# Altium PCB OLD-motordriver-v6.2.PcbDoc (part 2 of 2)
Units mil, origin at the board's own origin, x right, y up, seen from the top; angles counter-clockwise.
Board outline 3153.75 x 2790 mil, 4 copper layers (TOP, GND, POWER, BOT), stack 23.756 mil thick; 192 components, 82 nets, 493 pads, 611 vias.
Unrouted connection lines stored in the file: 13.
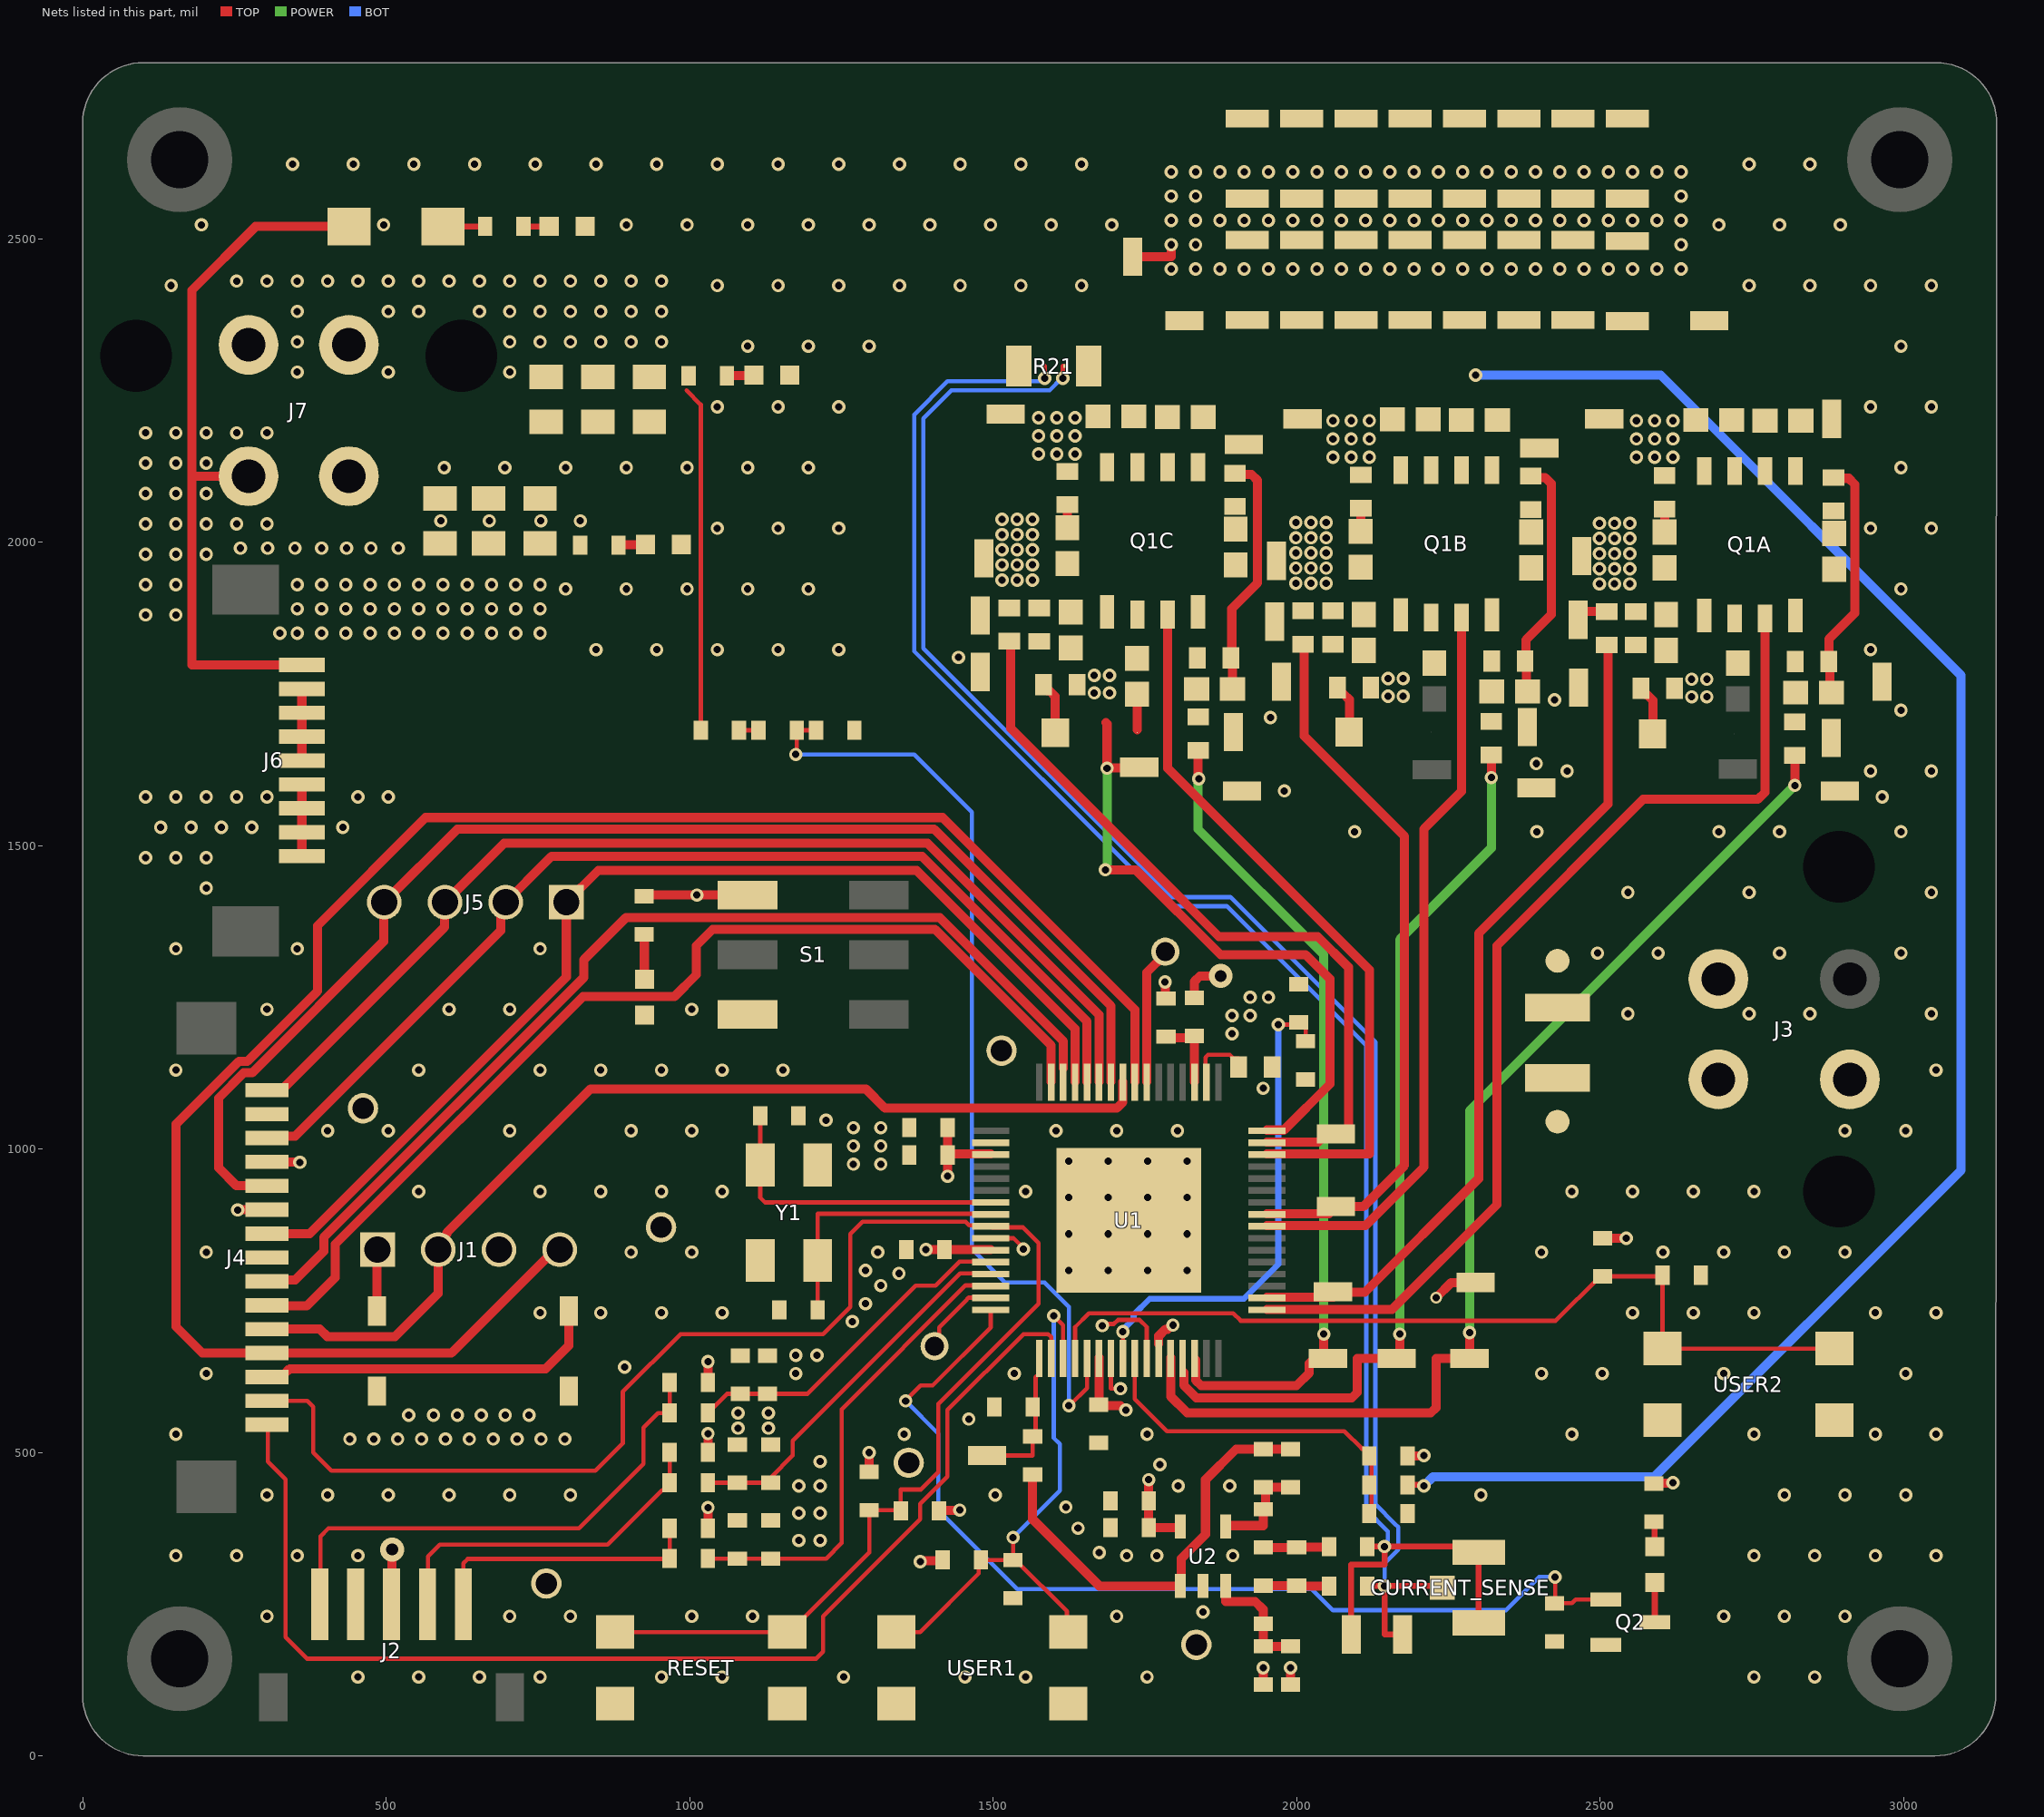
[diagram p4: the nets of this part, all layers, seen from the top]

## Via types
v1: diameter 22, hole 12, TOP to BOT, tented both sides, 606 vias
v2: diameter 22/22/22/22 (per signal layer), hole 12, TOP to BOT, tented both sides, 2 vias
v3: diameter 39.37, hole 19.68, TOP to BOT, tented both sides, 2 vias
v4: diameter 20, hole 12, TOP to BOT, tented both sides, 1 vias

## Nets (pads, with @x,y where several pads share a name; then routed paths per layer and width w, separated by ;. In a path a pad name is that pad's centre, name@x,y a point inside that pad or via, vN(x,y) a via of type N, cw(c..) or ccw(c..) an arc to the next point about the centre after c; other vN are vias at no path point) (continued)
BOOTC: BOOTC.1 C47C.2 D9C.1 U1.48 | length 1111.2
  TOP w15: v1(1685,1460) 1735,1460 1875,1320 2015,1320 2055,1280 2055,1106.89 1979.26,1031.14 U1.48@1951.22,1031.14 ; 1685.83,1702.39 1687.83,1700.39 v1(1687.83,1627.39) 1688.64,1628.19 1740.19,1628.19 BOOTC.1@1741,1629 ; C47C.2@1736.31,1749.86 1737.75,1748.42 1737.75,1690.39
  POWER w15: v1(1685,1460) 1685,1461.89 1687.97,1464.86 1687.97,1624.15 1687.83,1624.29 v1(1687.83,1627.39)
CIN: C19.2 R23.2 R24.2 U1.25 | length 599.5
  TOP w7: U1.25@1733.57,654.93 1733.57,587.95 1786.52,535 2078.8,535 2107.53,506.26 2111.47,506.26 2119.78,497.95 R23.2@2119.78,494.02 2123.5,490.29 2123.5,450.24 R24.2@2119.78,446.52 ; C19.2@2119.78,399.02 2123.5,402.74 2123.5,442.79 R24.2@2119.78,446.52 ; R24.2@2119.78,450.45 R24.2@2119.78,446.52
CRYSTAL_F0: C13.2 U1.7 Y1.1 | length 520.8
  TOP w7: C13.2@1116.48,1055 Y1.1@1116.48,973.74 1116.48,920 1124.52,911.96 U1.7@1496.22,911.96 U1.7@1494.27,910
CRYSTAL_F1: C14.2 U1.8 Y1.3 | length 443.6
  TOP w7: C14.2@1210.97,735 Y1.3@1210.97,816.26 1210.97,893.35 U1.8@1496.22,893.35
CURR_FB: C16.2 C_FB.1 R17.2 U1.17 | length 244.3
  TOP w7: C_FB.1@1490,495 1565.22,495 R17.2@1565.22,526.5 1570,531.28 1570,569.89 C16.2@1565.22,574.67 ; C16.2@1565.48,574.94 1570,579.45 1570,623.84 1576.09,629.93 U1.17@1576.09,656
ENC_A: J2.5 R1.2 R4.1 | length 460.5
  TOP w7: J2.5@627.17,250 627.17,317.17 634.42,324.42 966.65,324.42 R4.1@967.23,325 R1.2@967.23,375
ENC_A_MCU: C7.2 R4.2 R7.1 U1.14 | length 781.5
  TOP w7: R4.2@1030.22,325 R7.1@1078.72,325 1082.66,325 C7.2@1133.72,325 1225,325 1250.81,350.81 1250.81,571.05 1455,775.24 U1.14@1496.22,775.24
ENC_B: J2.4 R2.2 R5.1 | length 607.4
  TOP w7: J2.4@569,222.04 569,328.59 588.41,348 865.23,348 954.98,437.75 958.92,437.75 967.23,446.06 R5.1@967.23,450 R2.2@967.23,500
ENC_B_MCU: C8.2 R5.2 R8.1 U1.13 | length 628.2
  TOP w7: R5.2@1030.22,450 R8.1@1078.72,450 C8.2@1133.72,450 1133.72,458.72 1170,495 1170,519.2 1445.72,794.92 1446.34,794.92 U1.13@1496.22,794.92
ENC_N: J2.1 R3.2 R6.1 | length 884.3
  TOP w7: J2.1@391.83,222.04 391.83,361.83 405,375 817.65,375 924,481.35 924,541 948,565 R6.1@967.23,565 R3.2@967.23,615
ENC_N_MCU: C9.2 R6.2 R9.1 U1.12 | length 569.4
  TOP w7: R6.2@1030.22,565 1061.72,596.5 R9.1@1083.72,596.5 C9.2@1128.72,596.5 1194.08,596.5 1372.58,775 1405,775 1444.61,814.61 U1.12@1496.22,814.61
GND: C1.1 C2.1 C3.1 C4.1 C5.1 C7.1 C8.1 C9.1 C11.1 C12.1 C13.1 C14.1 C16.1 C17.1 C19.1 C20.1 C21.1 C22.1 D1.2 GND1.1 J1.03 J2.2 J4.02 J4.04 J4.06 J4.08 pad.2 Q2.2 R7.2 R8.2 R9.2 R10.2 R37.2 R38.1 RESET.1 RESET.2 S1.3 U1.2 U1.10 U1.23 U1.26 U1.EPAD U2.2 USER1.1 USER1.2 USER2.1 USER2.2 Y1.2 Y1.4 | length 430
  TOP w7: U1.10@1496.22,852.9 1533.97,852.9 1550,836.87 v1(1550,835) ; v1(1680,708.88) 1682.87,711.75 1699.26,711.75 1705.8,718.29 1741.71,718.29 1753.25,706.75 U1.26@1753.25,654.93 ; U1.23@1694.2,656 1694.2,605 v1(1710,605)
  TOP w15: v1(255.44,899.48) 255.68,899.72 303.76,899.72 J4.06@304,899.96 ; J4.04@304,978.7 304.35,978.35 357.65,978.35 v1(358,978) ; J2.2@450.36,254.08 J2.2@450.89,254.61 ; C17.1@1410.99,404 1411.49,404.5 1444.5,404.5 v1(1445,405) ; v1(1783.42,1275.3) 1783.57,1275.15 1783.57,1246.65 C5.1@1783.72,1246.5
  other v1: 453.72,130 553.72,130 653.72,130 753.72,130 953.72,130 1053.72,130 1253.72,130 1453.72,130 1553.72,130 1753.72,130 2753.72,130 2853.72,130 303.72,230 703.72,230 803.72,230 1003.72,230 1103.72,230 1703.72,230 2703.72,230 2803.72,230 2903.72,230 1846,237 153.72,330 253.72,330 353.72,330 453.72,330 1720,330 1770,330 1895,330 2753.72,330 2853.72,330 2953.72,330 3053.72,330 1675,335 1180,355 1215,355 1640,375 1180,400 1215,400 1620,410 303.72,430 403.72,430 503.72,430 603.72,430 703.72,430 803.72,430 1503.72,430 2303.72,430 2803.72,430 2903.72,430 3003.72,430 1180,445 1215,445 1805,445 1890,445 1775,480 1215,485 153.72,530 1353.72,530 1753.72,530 2453.72,530 2753.72,530 2953.72,530 3053.72,530 1080,540 1130,540 1460,555 1080,565 1130,565 203.72,630 1175,630 1535,630 2403.72,630 2503.72,630 2703.72,630 3003.72,630 893.07,640.65 1175,660 1210,660 1268.15,715.57 753.72,730 853.72,730 953.72,730 1053.72,730 2553.72,730 2653.72,730 2753.72,730 2953.72,730 3053.72,730 1290,745 1315,775 1345,795 1290,800 1625,800 1690,800 1755,800 1820,800 203.72,830 903.72,830 1003.72,830 1310,830 2403.72,830 2603.72,830 2703.72,830 2803.72,830 2903.72,830 1625,860 1690,860 1755,860 1820,860 1625,920 1690,920 1755,920 1820,920 553.72,930 753.72,930 853.72,930 953.72,930 1053.72,930 1553.72,930 2453.72,930 2553.72,930 2653.72,930 2753.72,930 1270,975 1315,975 1625,980 1690,980 1755,980 1820,980 1270,1005 1315,1005 403.72,1030 503.72,1030 703.72,1030 903.72,1030 1003.72,1030 1603.72,1030 1703.72,1030 1803.72,1030 2903.72,1030 3003.72,1030 1270,1035 1315,1035 1225,1047.5 153.72,1130 553.72,1130 753.72,1130 853.72,1130 953.72,1130 1053.72,1130 1153.72,1130 3053.72,1130 303.72,1230 603.72,1230 703.72,1230 1003.72,1230 153.72,1330 353.72,1330 753.72,1330 203.72,1430
  other v2: 1945,1100
GPIO_PA4: Q2.1 R38.2 U1.16 | length 1660.1
  TOP w7: v1@1355,585 1380.5,610.5 1400.5,610.5 1496.22,706.22 U1.16@1496.22,734.79 ; v1(2426,294.78) 2426,252.5 R38.2@2425,251.5 2453.99,251.5 2460,257.51 2509.54,257.51 Q2.1@2509.65,257.4
  BOT w7: v1(1356,584.78) 1410,530.78 1410,405 1540,275 2025,275 2060,240 2345,240 2399.78,294.78 v1(2426,294.78)
GPIO_PA7: C21.2 R27.2 U1.19 USER1.3 USER1.4 | length 928.8
  TOP w7: USER1.3@1340.54,204 1379.71,204 1476.31,300.6 1476.31,319.06 R27.2@1480,322.75 C21.2@1533,322.75 ; v1(1533,360) C21.2@1533,322.75 ; v1(1600,725) 1615.46,709.54 U1.19@1615.46,654.93 U1.19@1613.46,652.93 ; USER1.4@1624,204 1621.73,206.27 1621.73,237.96 1536.94,322.75 C21.2@1533,322.75
  BOT w7: v1(1533,360) 1610,437 1610,513.97 1600,523.97 v1(1600,725)
GPIO_PB0: C22.2 R29.2 U1.20 USER2.3 USER2.4 | length 1468.4
  TOP w7: U1.20@1635.14,656 1635.14,706.42 1658.02,729.29 1895.71,729.29 1908,717 2427.15,717 2500.15,790 R29.2@2504.08,790 2601.09,790 C22.2@2603.09,792 2603.09,671.2 USER2.3@2603,671.11 USER2.4@2886.46,671.11
HGA: C48A.2 HGA.1 Q1A.1 R30A.2 R33A.2 | length 55.7
  TOP w15: HGA.1@2464,1872 2464,1877.31 2472.25,1885.56 R30A.2@2511,1885.56
HGB: C48B.2 HGB.1 Q1B.1 R30B.2 R33B.2
HGC: C48C.2 HGC.1 Q1C.1 R30C.2 R33C.2
HV: C23.2 C24.2 C25.2 C29.2 C30.2 C31.2 C32.2 C33.2 C34.2 C35.2 C36.2 C37.2 C38.2 C39.2 C40.2 C41.2 C42.2 C43.2 C44.2 C46A.2 C46B.2 C46C.2 J6.2 J6.3 J6.4 J6.5 J7.3 J7.4 Q1A.7 Q1A.8 Q1B.7 Q1B.8 Q1C.7 Q1C.8 R16.2 R28A.2 R28B.2 R28C.2 R39.1 TP10A.1 TP10B.1 TP10C.1 TP11.1 | length 771.6
  TOP w7: 995,2250 1018.5,2226.5 R39.1@1018.5,1690
  TOP w15: J6.5@361.26,1640 J6.2@361.26,1758.11 ; TP11.1@1730,2470 1793.72,2470 v1(1793.72,2490)
  other v1: 325,1850 353.72,1850 393.72,1850 433.72,1850 473.72,1850 513.72,1850 553.72,1850 593.72,1850 633.72,1850 673.72,1850 713.72,1850 753.72,1850 353.72,1890 393.72,1890 433.72,1890 473.72,1890 513.72,1890 553.72,1890 593.72,1890 633.72,1890 673.72,1890 713.72,1890 753.72,1890 353.72,1930 393.72,1930 433.72,1930 473.72,1930 513.72,1930 553.72,1930 593.72,1930 633.72,1930 673.72,1930 713.72,1930 753.72,1930 2060,2140 2090,2140 2120,2140 2560,2140 2590,2140 2620,2140 1575,2145 1605,2145 1635,2145 2060,2170 2090,2170 2120,2170 2560,2170 2590,2170 2620,2170 1575,2175 1605,2175 1635,2175 2060,2200 2090,2200 2120,2200 2560,2200 2590,2200 2620,2200 1575,2205 1605,2205 1635,2205 353.72,2280 503.72,2280 703.72,2280 353.72,2330 703.72,2330 753.72,2330 803.72,2330 853.72,2330 903.72,2330 953.72,2330 353.72,2380 503.72,2380 553.72,2380 653.72,2380 703.72,2380 753.72,2380 803.72,2380 853.72,2380 903.72,2380 953.72,2380 253.72,2430 303.72,2430 353.72,2430 403.72,2430 453.72,2430 503.72,2430 553.72,2430 603.72,2430 653.72,2430 703.72,2430 753.72,2430 803.72,2430 853.72,2430 903.72,2430 953.72,2430 1793.72,2450 1833.72,2450 1873.72,2450 1913.72,2450 1953.72,2450 1993.72,2450 2033.72,2450 2073.72,2450 2113.72,2450 2153.72,2450 2193.72,2450 2233.72,2450 2273.72,2450 2313.72,2450 2353.72,2450 2393.72,2450 2433.72,2450 2473.72,2450 2513.72,2450 2553.72,2450 2593.72,2450 2633.72,2450 1833.72,2490 2633.72,2490 1793.72,2530 1833.72,2530 1873.72,2530 1913.72,2530 1953.72,2530 1993.72,2530 2033.72,2530 2073.72,2530 2113.72,2530 2153.72,2530 2193.72,2530 2233.72,2530 2273.72,2530 2313.72,2530 2353.72,2530 2393.72,2530 2433.72,2530 2473.72,2530 2513.72,2530 2553.72,2530 2593.72,2530 2633.72,2530 1793.72,2570 1833.72,2570 2633.72,2570 1793.72,2610 1833.72,2610 1873.72,2610 1913.72,2610 1953.72,2610 1993.72,2610 2033.72,2610 2073.72,2610 2113.72,2610 2153.72,2610 2193.72,2610 2233.72,2610 2273.72,2610 2313.72,2610 2353.72,2610 2393.72,2610 2433.72,2610 2473.72,2610 2513.72,2610 2553.72,2610 2593.72,2610 2633.72,2610
HVGA: HVGA.1 R30A.1 U1.34 | length 1404.7
  TOP w15: U1.34@1951.22,755.55 2060,755.55 HVGA.1@2060,765 2061.16,763.84 2112.84,763.84 2300,951 2300,1355 2513,1568 2513,1828.44 R30A.1@2511,1830.44
HVGB: HVGB.1 R30B.1 U1.41 | length 1187.6
  TOP w15: U1.41@1951.22,893.35 2053.35,893.35 HVGB.1@2065,905 2110,905 2178,973 2178,1515 2012.82,1680.18 2012.82,1829.56 R30B.1@2010.82,1831.56
HVGC: HVGC.1 R30C.1 U1.47 | length 1273.7
  TOP w15: R30C.1@1526.83,1836.83 1528.83,1834.83 1528.83,1693.17 1759.81,1462.19 1872,1350 2035,1350 2085.47,1299.53 2085.47,1033.25 2077.22,1025 2049.25,1025 2035.71,1011.46 U1.47@1951.22,1011.46
LGA: C51A.2 LGA.1 Q1A.4 R34A.2 R36A.2
LGB: C51B.2 LGB.1 Q1B.4 R34B.2 R36B.2
LGC: C51C.2 LGC.1 Q1C.4 R34C.2 R36C.2
LVGA: LVGA.1 R34A.1 U1.28 | length 1868
  TOP w15: U1.28@1792.62,656 1792.62,592.38 1820,565 2221.21,565 2230,573.79 2230,655 LVGA.1@2285,655 v1(2285,697.5) ; v1(2821,1599) v1(2821,1599) R34A.1@2821.04,1648.78
  POWER w15: v1(2285,697.5) 2285,1063 v1(2821,1599)
LVGB: LVGB.1 R34B.1 U1.29 | length 1507.4
  TOP w15: U1.29@1814.31,631.93 1814.31,610.69 1835,590 2091.21,590 2100,598.79 2100,655 LVGB.1@2165,655 2170,655 v1(2170,695) ; v1(2321,1612) 2321,1654.36 R34B.1@2321.08,1654.44
  POWER w15: v1(2170,695) 2170,1345 2321,1496 v1(2321,1612)
LVGC: LVGC.1 R34C.1 U1.30 | length 1363.5
  TOP w15: U1.30@1833.99,652.93 1833.99,618.79 1842.78,610 2000,610 2021,631 2021,646.75 2029.25,655 2045,655 v1(2045,695) ; v1@1838,1611 R34C.1@1838,1656.58
  POWER w15: v1(1839,1610) 1837.83,1608.83 1837.83,1527.17 2045,1320 v1(2045,695)
NetC15_1: C15.1 R18.1 R19.2 | length 105.4
  TOP w15: R18.1@1945,343.5 C15.1@2000.25,343.5 ; C15.1@2003.97,343.5 2004.72,344.25 2052.76,344.25 R19.2@2053.5,345
NetC15_2: C15.2 R14.1 R15.2 | length 108.7
  TOP w15: R14.1@1945,280.51 C15.2@2000.25,280.51 2000.76,280 R15.2@2053.5,280
NetC18_1: C18.1 R17.1 R22.2 U2.1 | length 715.7
  TOP w15: R17.1@1565.22,463.5 1565.22,389.78 1675,280 U2.1@1808.72,280 1810,281.28 1810,325 1850,365 1850,455 1900.51,505.51 C18.1@1945,505.51 R22.2@1990,505.51
NetC20_2: C20.2 R25.1 U1.24 | length 815.5
  TOP w7: U1.24@1713.88,656 v1(1713.88,698.79) ; v2(1970,1205) 1996.28,1205 1999.79,1208.5 R25.1@2003.72,1208.5 ; R25.1@2006.69,1208.5 2015,1200.19 C20.2@2015,1177.49
  BOT w10: v1(1713.88,698.79) 1713.88,701.81 1731.61,719.54 1731.61,726.61 1758.08,753.08 1913.08,753.08 1970,810 v2(1970,1205)
NetC45A_2: C45A.2 R28A.1 | length 37.9
  TOP w15: C45A.2@2606.47,2016.53 R28A.1@2606.47,2054.44
NetC45B_2: C45B.2 R28B.1 | length 37.9
  TOP w15: C45B.2@2106.3,2017.65 R28B.1@2106.3,2055.56
NetC45C_2: C45C.2 R28C.1 | length 37.9
  TOP w15: C45C.2@1622.31,2022.91 R28C.1@1622.31,2060.83
NetC46A_1: C46A.1 C49A.2
NetC46B_1: C46B.1 C49B.2
NetC46C_1: C46C.1 C49C.2
NetC50A_1: C50A.1 R35A.2
NetC50B_1: C50B.1 R35B.2
NetC50C_1: C50C.1 R35C.2
NetD1_1: D1.1 R11.1 | length 74.4
  TOP w15: R11.1@925,1353.5 925.52,1352.99 925.52,1280.04 D1.1@926.03,1279.53
NetD2_1: D2.1 R13.1 | length 44.9
  TOP w15: R13.1@882.99,1995 883.51,1995.52 926.92,1995.52 D2.1@927.44,1996.03
NetD3_1: D3.1 R16.1 | length 44.9
  TOP w15: R16.1@1061.5,2273.97 1062.01,2274.48 1105.43,2274.48 D3.1@1105.94,2275
NetD6_1: D6.1 R32.1 | length 41.7
  TOP w10: R32.1@2588.72,385.68 2590,384.4 D6.1@2590,344.53
NetD6_2: D6.2 Q2.3 | length 65.6
  TOP w10: D6.2@2590,285.47 2590.35,285.12 Q2.3@2590.35,220
NetD7_2: D7.2 R31.1 | length 69.4
  TOP w10: D7.2@593.96,2520 R31.1@663.35,2520
NetD8_1: D8.1 R31.2 | length 42.3
  TOP w10: R31.2@726.34,2520 D8.1@768.64,2520
NetD9A_2: D9A.2 R26A.1 | length 85
  TOP w15: R26A.1@2567.44,1759 2567.44,1755.06 2573.72,1748.78 2577.66,1748.78 2587,1739.44 D9A.2@2587,1684.44
NetD9B_2: D9B.2 R26B.1 | length 83.2
  TOP w15: R26B.1@2067.27,1760.12 2067.27,1756.18 2073.54,1749.9 2077.48,1749.9 2087,1740.38 D9B.2@2087,1687.44
NetD9C_2: D9C.2 R26C.1 | length 89.2
  TOP w15: R26C.1@1583.23,1765.06 1583.23,1761.13 1589.51,1754.85 1593.21,1754.85 1602,1746.06 1602,1686.56 D9C.2@1602.56,1686
NetJ4_15: J4.15 U1.18 | length 2012
  TOP w7: J4.15@304,545.63 305,544.63 305,485 334.22,455.78 334.22,195.78 370,160 1208.32,160 1220,171.68 1220,230 1380,390 1380,415 1425,460 1425,570 1550,695 1590.79,695 1595.77,690.02 U1.18@1595.77,654.93 U1.18@1594.89,655.81
NetPA3_1: PA3.1 U1.15 | length 139.8
  TOP w7: PA3.1@1403.72,675 1411.28,682.56 1411.28,706.28 1453.6,748.6 1460.04,755.04 1470.71,755.04 1471.22,755.55 U1.15@1496.22,755.55
NetPA12_1: PA12.1 U1.55 | length 226.6
  TOP w15: U1.55@1753.25,1111 1753.25,1290.77 1783.72,1321.25 PA12.1@1783.72,1325
NetR37_1: R37.1 U1.50 | length 130.1
  TOP w7: U1.50@1851.68,1109.93 1850,1111.61 1850,1150.9 1854.1,1155 1890,1155 1895.19,1149.81 1895.19,1144.69 R37.1@1904.88,1135 ; R37.1@1894.6,1149.22 1904.88,1149.22 R37.1@1904.88,1138.94
NetR39_2: R39.2 R40.1 | length 32
  TOP w7: R39.2@1081.5,1690 R40.1@1113.5,1690
NRST: C17.2 J4.14 R20.2 RESET.3 RESET.4 U1.9 | length 2816.5
  TOP w7: J4.14@304,585 370,585 380,575 380,500 410,470 845,470 890,515 890,600 985,695 1220,695 1265,740 1265,860 1285,880 1455,880 1460.89,874.11 1494.71,874.11 1497.91,870.9 1549.1,870.9 1575,845 1575,745 1410,580 1410,467.86 1381.14,439 1348,439 C17.2@1348,404 1347,405 R20.2@1296,405 1296,335.06 1164.94,204 RESET.4@1161,204 RESET.3@877.54,204
OUTA: C45A.1 C47A.1 C48A.1 C50A.2 J3.3 OUT1A.1 Q1A.2 Q1A.3 R33A.1 U1.33 | length 1709.8
  TOP w15: U1.33@1951.22,735.87 2157.59,735.87 2330,908.27 2330,1335 2571,1576 2760,1576 2771.73,1587.73 Q1A.3@2771.73,1874.22
  other v1: 2499,1931 2524,1931 2549,1931 2499,1956 2524,1956 2549,1956 2499,1981 2524,1981 2549,1981 2499,2006 2524,2006 2549,2006 2499,2031 2524,2031 2549,2031
OUTB: C45B.1 C47B.1 C48B.1 C50B.2 J3.2 OUT1B.1 Q1B.2 Q1B.3 R33B.1 U1.40 | length 1229.8
  TOP w15: U1.40@1951.22,873.66 2113.66,873.66 2210,970 2210,1527.29 2272,1589.29 Q1B.3@2272,1875.49
  other v1: 1998.82,1932.12 2023.82,1932.12 2048.82,1932.12 1998.82,1957.12 2023.82,1957.12 2048.82,1957.12 1998.82,1982.12 2023.82,1982.12 2048.82,1982.12 1998.82,2007.12 2023.82,2007.12 2048.82,2007.12 1998.82,2032.12 2023.82,2032.12 2048.82,2032.12
OUTC: C45C.1 C47C.1 C48C.1 C50C.2 J3.1 OUT1C.1 Q1C.2 Q1C.3 R33C.1 U1.46 | length 1195.3
  TOP w15: Q1C.3@1787.57,1880.61 1787.57,1627.43 2120,1295 2120,991.77 U1.46@1951.22,991.77
  other v1: 1514.83,1937.39 1539.83,1937.39 1564.83,1937.39 1514.83,1962.39 1539.83,1962.39 1564.83,1962.39 1514.83,1987.39 1539.83,1987.39 1564.83,1987.39 1514.83,2012.39 1539.83,2012.39 1564.83,2012.39 1514.83,2037.39 1539.83,2037.39 1564.83,2037.39
PGND: C6.1 C10.2 C23.1 C24.1 C25.1 C26.1 C27.1 C28.1 C29.1 C30.1 C31.1 C32.1 C33.1 C34.1 C35.1 C36.1 C37.1 C38.1 C39.1 C40.1 C41.1 C42.1 C43.1 C44.1 D2.2 D3.2 D8.2 J6.6 J6.7 J6.8 J6.9 J7.1 PGND1.1 R10.1 R12.1 R21.2 R41.1 TP1.1 TP2.1 TP3.1 TP4.1 TP5.1 TP6.1 TP7.1 TP8.1 TP9.1 TP12.1 U1.27 | length 365.8
  TOP w15: J6.9@361.26,1482.52 J6.8@361.26,1521.89 J6.6@361.26,1600.63 ; U1.27@1772.94,679 1772.94,691.91 1783.95,702.93 1787.55,702.93 1794.41,709.79 v1(1796.31,709.79) ; C6.1@1831.99,1249.18 1831.99,1276.21 1840.78,1285 v3(1875,1285) ; R12.1@1945,117.52 v1(1945,145) ; C10.2@1990,117.52 v1(1990,145) ; v4(2230,755) 2255,780 TP9.1@2295,780
  other v1: 2545.83,1222.74 2745.83,1222.74 2845.83,1222.74 3045.83,1222.74 2495.83,1322.74 2595.83,1322.74 2795.83,1322.74 2995.83,1322.74 2545.83,1422.74 2745.83,1422.74 3045.83,1422.74 103.72,1480 153.72,1480 203.72,1480 2095.83,1522.74 2395.83,1522.74 2695.83,1522.74 2795.83,1522.74 2995.83,1522.74 128.72,1530 178.72,1530 228.72,1530 278.72,1530 428.72,1530 103.72,1580 153.72,1580 203.72,1580 253.72,1580 303.72,1580 453.72,1580 503.72,1580 2965,1580 1980,1590 2445.83,1622.74 2945.83,1622.74 3045.83,1622.74 2395,1635 1957,1711 2995.83,1722.74 2425,1740 1443,1810 845.83,1822.74 945.83,1822.74 1045.83,1822.74 1145.83,1822.74 1245.83,1822.74 2945.83,1822.74 795.83,1922.74 895.83,1922.74 995.83,1922.74 1095.83,1922.74 1195.83,1922.74 2995.83,1922.74 1045.83,2022.74 1145.83,2022.74 1245.83,2022.74 2945.83,2022.74 3045.83,2022.74 595.83,2122.74 695.83,2122.74 795.83,2122.74 895.83,2122.74 995.83,2122.74 1095.83,2122.74 1195.83,2122.74 2995.83,2122.74 1045.83,2222.74 1145.83,2222.74 1245.83,2222.74 2945.83,2222.74 3045.83,2222.74 1095.83,2322.74 1195.83,2322.74 1295.83,2322.74 2995.83,2322.74 145.83,2422.74 1045.83,2422.74 1145.83,2422.74 1245.83,2422.74 1345.83,2422.74 1445.83,2422.74 1545.83,2422.74 1645.83,2422.74 2745.83,2422.74 2845.83,2422.74 2945.83,2422.74 3045.83,2422.74 195.83,2522.74 495.83,2522.74 895.83,2522.74 995.83,2522.74 1095.83,2522.74 1195.83,2522.74 1295.83,2522.74 1395.83,2522.74 1495.83,2522.74 1595.83,2522.74 1695.83,2522.74 2695.83,2522.74 2795.83,2522.74 2895.83,2522.74 345.83,2622.74 445.83,2622.74 545.83,2622.74 645.83,2622.74 745.83,2622.74 845.83,2622.74 945.83,2622.74 1045.83,2622.74 1145.83,2622.74 1245.83,2622.74 1345.83,2622.74 1445.83,2622.74 1545.83,2622.74 1645.83,2622.74 2745.83,2622.74 2845.83,2622.74
SENSE: C49A.1 C49B.1 C49C.1 C51A.1 C51B.1 C51C.1 Q1A.5 Q1A.6 Q1B.5 Q1B.6 Q1C.5 Q1C.6 R21.1 R24.1 R35A.1 R35B.1 R35C.1 R36A.1 R36B.1 R36C.1 SENSE1A.1 SENSE1B.1 SENSE1C.1 | length 4165.3
  TOP w7: v1@2208.48,446.52 v1(2210,445)
  TOP w10: R24.1@2182.77,446.52 v1@2208.48,446.52
  TOP w15: C51C.1@1894.53,1758 1894.53,1807 1891.56,1807 1893.35,1808.79 1893.35,1890.35 1935.83,1932.83 1935.83,2101.39 1925.73,2111.49 1896.72,2111.49 R35C.1@1894.57,2113.64 ; R36B.1@2376.56,1801 2378,1801 2378,1839 2419.82,1880.82 2419.82,2096.12 2409.72,2106.22 2380.71,2106.22 R35B.1@2378.56,2108.37 ; R36B.1@2376.85,1805.07 2376.85,1801.13 2378.49,1799.49 2378.49,1760.23 C51B.1@2380.13,1758.59 ; R36A.1@2876.56,1803 2879.04,1800.52 2879.04,1761.34 C51A.1@2879,1761.3 ; R36A.1@2877,1804 2877,1840 2920,1883 2920,2095 2909.9,2105.1 2880.88,2105.1 R35A.1@2878.73,2107.25
  BOT w15: v1(2210,445) 2225,460 2590,460 3095,965 3095,1780 2600,2275 v1(2295,2275)
SENSE_F_N: C18.2 R18.2 R22.1 U2.4 | length 172.5
  TOP w15: U2.4@1883.53,378 1883.53,379.43 1945,379.43 R18.2@1945,406.5 ; R18.2@1948.72,406.5 1948.72,438.8 C18.2@1945,442.52 R22.1@1990,442.52
SENSE_F_P: C10.1 R12.2 R14.2 U2.3 | length 198.3
  TOP w15: U2.3@1883.53,280 1883.53,254.42 1931.95,254.42 1945,241.37 R14.2@1945,217.52 R12.2@1945,180.51 C10.1@1990,180.51
SENSE_N: CURRENT_SENSE.2 CURRENT_SENSE.3 R19.1 R21.S2 S_N.1 | length 3016.4
  TOP w7: R21.S2@1581.25,2290 1585,2290 v1(1585,2270)
  TOP w10: S_N.1@2090,200 2090,315 2145,315 v1(2145,345) ; R19.1@2116.5,345 v1(2145,345) ; CURRENT_SENSE.2@2300,219.12 CURRENT_SENSE.3@2300,335.27 2290.27,345 v1(2145,345)
  BOT w7: v1(1585,2270) 1585,2265 1425,2265 1370,2210 1370,1820 1790,1400 1885,1400 2115,1170 2115,405.41 2150.41,370 2150.41,354.46 2145,349.06 v1(2145,345)
SENSE_P: CURRENT_SENSE.1 R15.1 R21.S1 S_P.1 | length 2829.3
  TOP w7: v1(1615,2270) 1615,2290 R21.S1@1618.75,2290
  TOP w10: R15.1@2116.5,280 v1(2145,280) ; S_P.1@2175,200 2145,200 v1(2145,280) ; CURRENT_SENSE.1@2239.96,277.19 2237.16,280 v1(2145,280)
  BOT w7: v1(1615,2270) 1613.28,2270 1593.28,2250 1431.21,2250 1385,2203.79 1385,1825 1795,1415 1891.21,1415 2130,1176.21 2130,414.45 2162.43,382.02 2167.41,377.04 2167.41,339.83 2145,317.42 v1(2145,280)
SPI_CLK: J4.07 J5.01 U1.61 | length 1869.2
  TOP w15: J4.07@281.07,860.45 281.21,860.59 J4.07@304,860.59 374.31,860.59 797,1283.28 J5.01@797,1406.5 849.5,1459 1374,1459 1635.14,1197.86 U1.61@1635.14,1111
SPI_CS: J4.05 J5.04 U1.58 | length 2143.6
  TOP w15: J4.05@304,939.33 253.67,939.33 224,969 224,1084 265.37,1125.37 279.37,1125.37 495.94,1341.94 495.94,1405.44 617.55,1527.05 1402.95,1527.05 1694.2,1235.8 U1.58@1694.2,1111
SPI_MISO: J4.01 J5.03 U1.59 | length 1790.3
  TOP w15: J4.01@304,1096.81 327.62,1096.81 596.06,1365.25 596.06,1405.56 694.5,1504 1392,1504 1674.51,1221.49 U1.59@1674.51,1111
SPI_MOSI: J4.03 J5.02 U1.60 | length 1777.3
  TOP w15: J4.03@304,1018.07 307,1021.07 350.07,1021.07 688.95,1359.95 688.95,1398.45 772.5,1482 1383,1482 1654.83,1210.17 U1.60@1654.83,1111
SWD_CLK: J1.02 J4.11 U1.57 | length 1685.1
  TOP w15: J4.11@304,703.11 390.89,703.11 403,691 515.04,691 586,761.96 586,845.39 600.09,859.48 600.09,862.09 837,1099 1290.29,1099 1321.77,1067.53 1704.17,1067.53 1713.88,1077.24 U1.57@1713.88,1111
SWD_IO: J1.04 J4.12 U1.56 | length 3169.1
  TOP w15: J1.04@792.91,848.91 607.74,663.74 J4.12@304,663.74 197.26,663.74 154,707 154,1040.87 205,1091.87 257.5,1144.37 271.5,1144.37 387,1259.87 387,1368 565.05,1546.05 1416.95,1546.05 1733.57,1229.43 U1.56@1733.57,1111
UART_RX: J4.10 U1.63 | length 1725.7
  TOP w15: J4.10@326.4,741.26 369.26,741.26 416.22,788.22 416.22,843.05 824.17,1251 975,1251 1011,1287 1011,1335 1038,1362 1404.48,1362 1595.77,1170.71 U1.63@1595.77,1111
UART_TX: J4.09 U1.62 | length 1719.2
  TOP w15: J4.09@304,781.85 306.61,784.46 350.46,784.46 397.22,831.22 397.22,854.22 826,1283 826,1312 895,1381 1412.35,1381 1614.77,1178.58 1614.77,1177.87 1615.46,1177.19 U1.62@1615.46,1132.93
VBUS_FDBK: R40.2 R41.2 U1.21 | length 1571
  TOP w7: v1@1176.5,1650 R40.2@1176.5,1690 R41.2@1208.5,1690 ; v1@1627.66,578.67 1654.83,605.84 U1.21@1654.83,654.93
  BOT w7: v1(1175,1650) 1370,1650 1465,1555 1465,835 1520,780 1585,780 1625,740 v1(1625,577.18)
VCC: C5.2 C6.2 C26.2 C27.2 C28.2 D7.1 J6.1 J7.2 R13.2 R25.2 R26A.2 R26B.2 R26C.2 U1.51 | length 1315.1
  TOP w15: J7.2@273.37,2108.46 180,2108.46 ; J6.1@361.26,1797.48 335.67,1797.48 180,1797.48 180,2108.46 ; D7.1@438.72,2520 285,2520 180,2415 180,2108.46 ; C5.2@1783.72,1183.5 1831.99,1183.5 U1.51@1831.99,1111
  other v1: 1893.72,1190 1893.72,1220 1923.72,1220 1923.72,1250 1953.72,1250 2651,1745 2676,1745 2150.82,1746.12 2175.82,1746.12 1666.83,1751.39 1691.83,1751.39 2651,1774 2676,1774 2150.82,1775.12 2175.82,1775.12 1666.83,1780.39 1691.83,1780.39 103.72,1880 153.72,1880 103.72,1930 153.72,1930 103.72,1980 153.72,1980 203.72,1980 260,1990 305,1990 350,1990 393.72,1990 435,1990 475,1990 520,1990 103.72,2030 153.72,2030 203.72,2030 253.72,2030 303.72,2030 590,2035 670,2035 755,2035 820,2035 103.72,2080 153.72,2080 203.72,2080 103.72,2130 153.72,2130 203.72,2130 103.72,2180 153.72,2180 203.72,2180 253.72,2180 303.72,2180
VDD: C1.2 C2.2 C3.2 C4.2 C11.2 C12.2 D4.C D5.C J2.3 R1.1 R2.1 R3.1 R11.2 R20.1 R23.1 R27.1 R29.1 R32.2 S1.1 U1.3 U1.11 U1.22 U2.5 | length 1073.9
  TOP w15: J2.3@509.89,210.37 509.53,210.73 509.53,339.53 v3(510,340) ; R11.2@925,1416.5 926.93,1418.43 v1(1012.15,1418.43) S1.1@1095.46,1418.43 ; R1.1@1030.22,375 v1(1030.22,409.29) ; R2.1@1030.22,500 v1(1030.22,531.07) ; R3.1@1030.22,615 v1(1030.22,649.5) ; R20.1@1296,465.49 R20.1@1296,467.99 v1(1296,499.78) ; v1(1380,320) 1381.34,321.34 1415.6,321.34 R27.1@1417.01,322.75 ; v1(1389.43,834.29) U1.11@1496.22,834.29 ; v1(1425,955) 1425,981.75 1423.72,991.77 U1.3@1496.22,991.77 ; C2.2@1425,990 C1.2@1425,1035 ; U1.22@1674.51,656 1674.51,577.18 1710.19,577.18 ; v1(1756.5,455) 1756.5,421.28 C11.2@1756.5,376.28 1807.22,376.28 1808.72,377.78 U2.5@1808.72,378 ; R23.1@2182.77,494.02 2209.02,494.02 v1(2210,495) ; R29.1@2504.08,852.99 v1(2543.08,853) ; R32.2@2592.77,449.02 v1@2619.02,449.02
  other v1: 2620,450 440.34,522.13 479.71,522.13 519.08,522.13 558.45,522.13 597.82,522.13 637.19,522.13 676.56,522.13 715.93,522.13 755.3,522.13 794.67,522.13 537.3,561.5 578.13,561.5 617.5,561.5 656.87,561.5 696.24,561.5 735.62,561.5 1718.72,570
VDD_SWD: D4.A J1.01 | length 101.4
  TOP w15: D4.A@485,733 485,833 J1.01@486,834
VDD_UI: D5.A J4.13 | length 575.4
  TOP w15: J4.13@304,624.37 308.31,628.68 331.93,628.68 341.25,638 763,638 801,676 801,724 D5.A@801,733
pads on no net: J2.6 J2.7 J3.4 J3.MH1 J4.S1 J4.S2 J6.MP1 J6.MP2 J7.MH1 S1.4 S1.5 S1.6 U1.1 U1.4 U1.5 U1.6 U1.31 U1.32 U1.36 U1.37 U1.38 U1.39 U1.43 U1.44 U1.45 U1.49 U1.52 U1.53 U1.54

## Polygon pours and split planes (outlines as drawn)
PGND on TOP "NONET_L-01_P-001" (solid, remove dead copper, pour order 172): 48.77,2750.09 3098.77,2750.09 3098.77,1160.09 1798.77,1160.09 1404.86,1554 48.77,1554
GND on TOP "GND_L01_P169" (solid, remove dead copper, pour order 169): 606.97,1625 426.97,1445 41.97,1445 41.97,20 3106.97,20 3106.97,1145 1831.97,1145 1351.97,1625
PGND on TOP "NONET_L-01_P-001" (solid, pour order 167): 315,1465 50,1465 50,1615 545,1615 545,1465
HV on TOP "TOP-HV 1" (solid, pour order 141): 1975.09,2121.44 2085.09,2121.44 2085.09,2067.98 2155.09,2067.98 2155.09,1951.44 2240.09,1951.44 2240.09,2079.44 2238.09,2081.44 2237.83,2081.44 2237.83,2163.8 2182.45,2163.8 2182.21,2221.44 1975.09,2221.44
HV on TOP "TOP-HV 3" (solid, pour order 170): 301.1,1625 498,1625 630,1757 703,1830 780,1830 780,1960 230,1960 230,1830 415,1830 415,1775 301.1,1775
SENSE on TOP "SENSE_L01_P166" (solid, pour order 166): 1670,2325 1670,2255 1700,2255 1700,2080 2907.43,2080 2907.43,2325
OUTC on TOP "TOP-No Net" (solid, remove dead copper, pour order 165): 1808.83,1904.39 1825.83,1921.39 1918.83,1921.39 1918.83,1991.39 1600.83,1991.39 1600.83,2063.39 1495.83,2063.39 1495.83,1919.39 1559.83,1919.39 1559.83,1793.39 1808.83,1793.39
NetC46C_1 on TOP "NONET_L-01_P-001" (solid, remove dead copper, pour order 154): 1710.83,2186.39 1810.83,2186.39 1810.83,2233.94 1710.83,2233.94
NetC50C_1 on TOP "NONET_L-01_P-001" (solid, remove dead copper, pour order 153): 1874.83,2000.39 1916.83,2000.39 1916.83,2073.39 1874.83,2073.39
LGC on TOP "NONET_L-01_P-001" (solid, remove dead copper, pour order 152): 1865.83,1755 1865.83,1754 1914,1754 1914,1681 1810.83,1681 1810.83,1900.39 1865.83,1900.39
HGC on TOP "NONET_L-01_P-001" (solid, remove dead copper, pour order 151): 1500,1870 1500,1845 1460,1845 1460,1911.39 1660.83,1911.39 1665.83,1916.39 1700.83,1916.39 1700.83,1854.39 1615.83,1854.39 1593.83,1876.39 1506.39,1876.39
VCC on TOP "NONET_L-01_P-001" (solid, remove dead copper, pour order 150): 1620.83,1741.39 1661.83,1741.39 1666.83,1736.39 1713.83,1736.39 1713.83,1797.39 1620.83,1797.39
OUTB on TOP "TOP-OUTB" (solid, remove dead copper, pour order 149): 2292.82,1899.12 2309.82,1916.12 2402.82,1916.12 2402.82,1986.12 2084.82,1986.12 2084.82,2058.12 1979.82,2058.12 1979.82,1914.12 2043.82,1914.12 2043.82,1788.12 2292.82,1788.12
NetC46B_1 on TOP "NONET_L-01_P-001" (solid, remove dead copper, pour order 148): 2194.82,2181.12 2294.82,2181.12 2294.82,2228.68 2194.82,2228.68
NetC50B_1 on TOP "NONET_L-01_P-001" (solid, remove dead copper, pour order 147): 2358.82,1995.12 2400.82,1995.12 2400.82,2068.12 2358.82,2068.12
LGB on TOP "NONET_L-01_P-001" (solid, remove dead copper, pour order 146): 2294.82,1660 2411,1660 2411,1895.12 2294.82,1895.12
HGB on TOP "NONET_L-01_P-001" (solid, remove dead copper, pour order 145): 2184.82,1849.12 2099.82,1849.12 2077.82,1871.12 1950,1871.12 1950,1906.12 2144.82,1906.12 2149.82,1911.12 2184.82,1911.12
VCC on TOP "NONET_L-01_P-001" (solid, remove dead copper, pour order 144): 2104.82,1736.12 2145.82,1736.12 2150.82,1731.12 2197.82,1731.12 2197.82,1792.12 2104.82,1792.12
OUTA on TOP "TOP-OUTA" (solid, remove dead copper, pour order 143): 2793,1898 2810,1915 2903,1915 2903,1985 2585,1985 2585,2065 2480,2065 2480,1913 2544,1913 2544,1787 2793,1787
HV on TOP "TOP-HV 2" (solid, pour order 142): 2475,2120 2585,2120 2585,2066.54 2655,2066.54 2655,1950 2740,1950 2740,2078 2475,2080 2737.74,2080 2737.74,2162.36 2682.36,2162.36 2682.11,2220 2475,2220
HV on TOP "TOP-HV" (solid, pour order 139): 1491.06,2126.39 1601.06,2126.39 1601.06,2072.93 1671.06,2072.93 1671.06,1956.39 1756.06,1956.39 1756.06,2084.39 1754.06,2086.39 1753.8,2086.39 1753.8,2168.75 1698.42,2168.75 1698.17,2226.39 1491.06,2226.39
NetC46A_1 on TOP "NONET_L-01_P-001" (solid, remove dead copper, pour order 137): 2695,2180 2795,2180 2795,2227.56 2695,2227.56
NetC50A_1 on TOP "NONET_L-01_P-001" (solid, remove dead copper, pour order 136): 2859,1994 2901,1994 2901,2067 2859,2067
LGA on TOP "NONET_L-01_P-001" (solid, remove dead copper, pour order 135): 2795,1678 2909,1678 2909,1894 2795,1894
HGA on TOP "NONET_L-01_P-001" (solid, remove dead copper, pour order 134): 2685,1848 2600,1848 2578,1870 2490,1870 2490,1905 2645,1905 2650,1910 2685,1910
VCC on TOP "NONET_L-01_P-001" (solid, remove dead copper, pour order 133): 2605,1735 2646,1735 2651,1730 2698,1730 2698,1791 2605,1791
VCC on TOP "VCC_L01_P131" (solid, pour order 131): 365,2025 845,2025 845,1970 235,1970 220,1955 220,1830 40,1830 40,2225 345,2225 345,2045
HV on TOP "HV_L01_P130" (solid, pour order 130): 200,2475 200,2235 1020,2235 1020,2475
HV on TOP "HV_L01_P129" (solid, pour order 129): 1770,2640 1770,2430 2665,2430 2665,2640
VCC on TOP "NONET_L-01_P-001" (solid, pour order 128): 1808.72,1210 1818.72,1220 1848.72,1220 1918.72,1290 2023.72,1290 2023.72,1240 1988.72,1240 1918.72,1170 1808.72,1170
VDD on TOP "VDD_L01_P121" (solid, pour order 127): 407,617 407,490 843,490 843,617
VDD on POWER "VDD_L03_P160" (solid, pour order 160): 40,1685 40,40 3100,40 3100,1685
VCC on POWER "VCC_L03_P158" (solid, pour order 158): 845,1965 251,1965 251,1825 365,1825 3105,1825 3105,1170 1455,1170 930,1695 40,1695 40,2215 845,2215
HV on POWER "HV_L03_P157" (solid, pour order 157): 40,2225 790,2225 850,2165 850,1980 830,1960 251,1960 251,1835 3115,1835 3115,2710 40,2710
VDD on POWER "NONET_L-01_P-001" (solid, pour order 168): 405,490 840,490 840,615 410,615 405,615
GND on BOT "GND_L04_P164" (solid, remove dead copper, pour order 164): 1280,1740 1280,2210 1395,2325 1635,2325 1635,1885 2122.11,1397.89 2164.19,1296.29 2269.92,1168.24 2297.04,1150.35 3100,1160 3100,35 35,35 35,1740
PGND on BOT "NONET_L-01_P-001" (solid, pour order 171): 2245,1040 2245,1195 1685,1755 50,1755 50,2755 3110,2755 3110,1040
OUTA on BOT "BOT-OUTA" (solid, pour order 159): 2479,1676 2815,1340 2815,1035 3115,1035 3115,1541.93 2655,2001.93 2655,2071 2479,2071
OUTB on BOT "OUTB_L04_P156" (solid, pour order 156): 2150,2001.21 2150,2069.63 1965,2072.37 1965,1830 2590,1205 2795,1205 2795,1315 2179.14,1930.86
OUTC on BOT "OUTC_L04_P155" (solid, pour order 155): 1490,2060 1490,1880 1560,1880 2405,1035 2795,1035 2795,1190 2560,1190 1690,2060
GND on GND "GND_L02_P162" (solid, remove dead copper, pour order 162): 705.6,1740 425.35,1454.51 40,1454.51 35,35 3100,35 3100,1160 1950,1160 1370,1740
PGND on GND "GND-PGND" (solid, pour order 161): 675,1705 430,1460 50,1460 50,1705 50,2750 3100,2750 3100,1160 2350,1160 2350,528.07 2094.07,528.07 2087.7,525.43 2073.08,510.81 2073.08,372.08 2075.72,365.72 2077.8,363.64 2084.16,361 2350,361 2350,120 1925,120 1925,235 1870,235 1870,410 1869.78,485.22 1765,590 1765,735 1900,735 1910,745 1910,1045 1975,1045 2035,1105 2035,1130 2005,1160 1948.72,1160 1403.72,1705

## Keep-outs
Keep-Out Layer:
  lines w78.74: 3151.96,100 cw(c3051.96,100) 3051.96,0 100,0 cw(c100,100) 0,100 0,2690 -0.02,2690 cw(c99.98,2690) 99.98,2790 3053.72,2790 cw(c3053.72,2690) 3153.72,2690 3151.99,100 ; 3151.96,100 3151.99,100

## Other copper
TOP:
  pour cut-out: 1750.83,1956.39 1773.83,1956.39 1773.83,1991.39 1750.83,1991.39
  pour cut-out: 2234.82,1951.12 2257.82,1951.12 2257.82,1986.12 2234.82,1986.12
  pour cut-out: 2735,1950 2758,1950 2758,1985 2735,1985
  pour cut-out: 1500,2330 1500,2325 1525,2325 1525,2255 1500,2255 1500,2250 1645,2250 1645,2330

## Silkscreen, mask and mechanical layers (free items; w line width, h text height)
Top Overlay:
  drawing of 28 lines, arcs and shapes, not listed
  text "DC-LINK" at 1660,2682.48 h50
  text "WARNING - INCORRECT VOLTAGE SOURCE" at 660,2567.48 h50
  text "HV" at 1726,2516 h25
  text "POWER | HV & VCC" at 138,2413 h30
  text "PGND" at 2641,2396 h25
  text "PGND" at 1761,2391 h25
  text "HV" at 1220,2265.83 h30
  text "SENSE" at 2823,2260 h25
  text "C-snub" at 1711,2251 h25
  text "HV" at 1986,2231 h25
  text "HV" at 2476,2231 h25
  text "HV" at 1426,2206 h25
  text "SENSE" at 1924,2186 h25 r90
  text "SENSE" at 2409,2186 h25 r90
  text "RC-snub" at 1416,2086 h25
  text "OUTA" at 2479,2026 h25 r90
  text "OUTB" at 1979,2016 h25 r90
  text "VCC" at 1050.03,1985.5 h30
  text "OUTC" at 1439,1936 h25 r90
  text "HGC" at 1439,1851 h25 r90
  text "PGND" at 3019,1746 h25 r90
  text "PGND" at 2034,1711 h25 r90
  text "PGND" at 2524,1706 h25 r90
  text "PGND" at 1449,1698 h25 r90
  text "PGND" at 1966,1581 h25
  text "PGND" at 2451,1581 h25
  text "PGND" at 2956,1576 h25
  text "FLASH" at 1386,1421 h25
  text "PGND" at 2411,1356 h25
  text "CS MISO MOSI CLK" at 413,1298 h30
  text "SRAM" at 1401,1246 h25
  text "GND" at 1405,1156 h25
  text "VDD" at 890,1140.78 h30
  text "GND" at 470,1101 h25
  text "GND" at 2416,981 h25
  text "MOTOR" at 2618,953 h30
  text "3V3 CLK GND IO" at 437,906 h30
  text "GND" at 989,859 h25
  text "PGND" at 2256,816 h25
  text "FLASH" at 567,659 h30
  text "GND" at 1427,464 h25 r90
  text "ENCODER" at 398,393 h30
  text "GND" at 776,183 h25 r90
  text "Motor Driver V6.1 /  / Kenny Wakaba / Mark Long / James Coffin / Clint Lee / Jeanette Guo  / Musa Charara" at 2615,130 h50
  text "GND" at 1803,125 h25
Board Shape:
  lines w10: -0.02,2690 cw(c99.98,2690) 99.98,2790 3053.72,2790 cw(c3053.72,2690) 3153.72,2690 3151.99,100 cw(c3051.96,100) 3051.96,0 100,0 cw(c100,100) 0,100 0,2690
Mounting holes:
  lines w5: 3151.96,100 cw(c3051.96,100) 3051.96,0 100,0 cw(c100,100) 0,100 0,2690 -0.02,2690 cw(c99.98,2690) 99.98,2790 3053.72,2790 cw(c3053.72,2690) 3153.72,2690 3151.99,100 ; 3151.96,100 3151.99,100 ; 160,160 2993.72,160 2993.72,2630 160,2630 160,160

## Dimensions
99.98,2790 to 100,0 on Bottom Courtyard
0,2690 to 3153.72,2690 on Bottom Courtyard

## Text inside footprints (layer, text, board x,y; h text height)
U1: Top Overlay "*" at 1493,1086.93 h30; Top Overlay "*" at 1558,1021.93 h30